# Altium PCB ThermoE.PcbDoc
Units mm, origin at the board's own origin, x right, y up, seen from the top; angles counter-clockwise.
Board outline 47 x 50 mm, 2 copper layers (Top Layer, Bottom Layer), stack 1.671 mm thick; 63 components, 54 nets, 227 pads, 117 vias.
Unrouted connection lines stored in the file: 1.
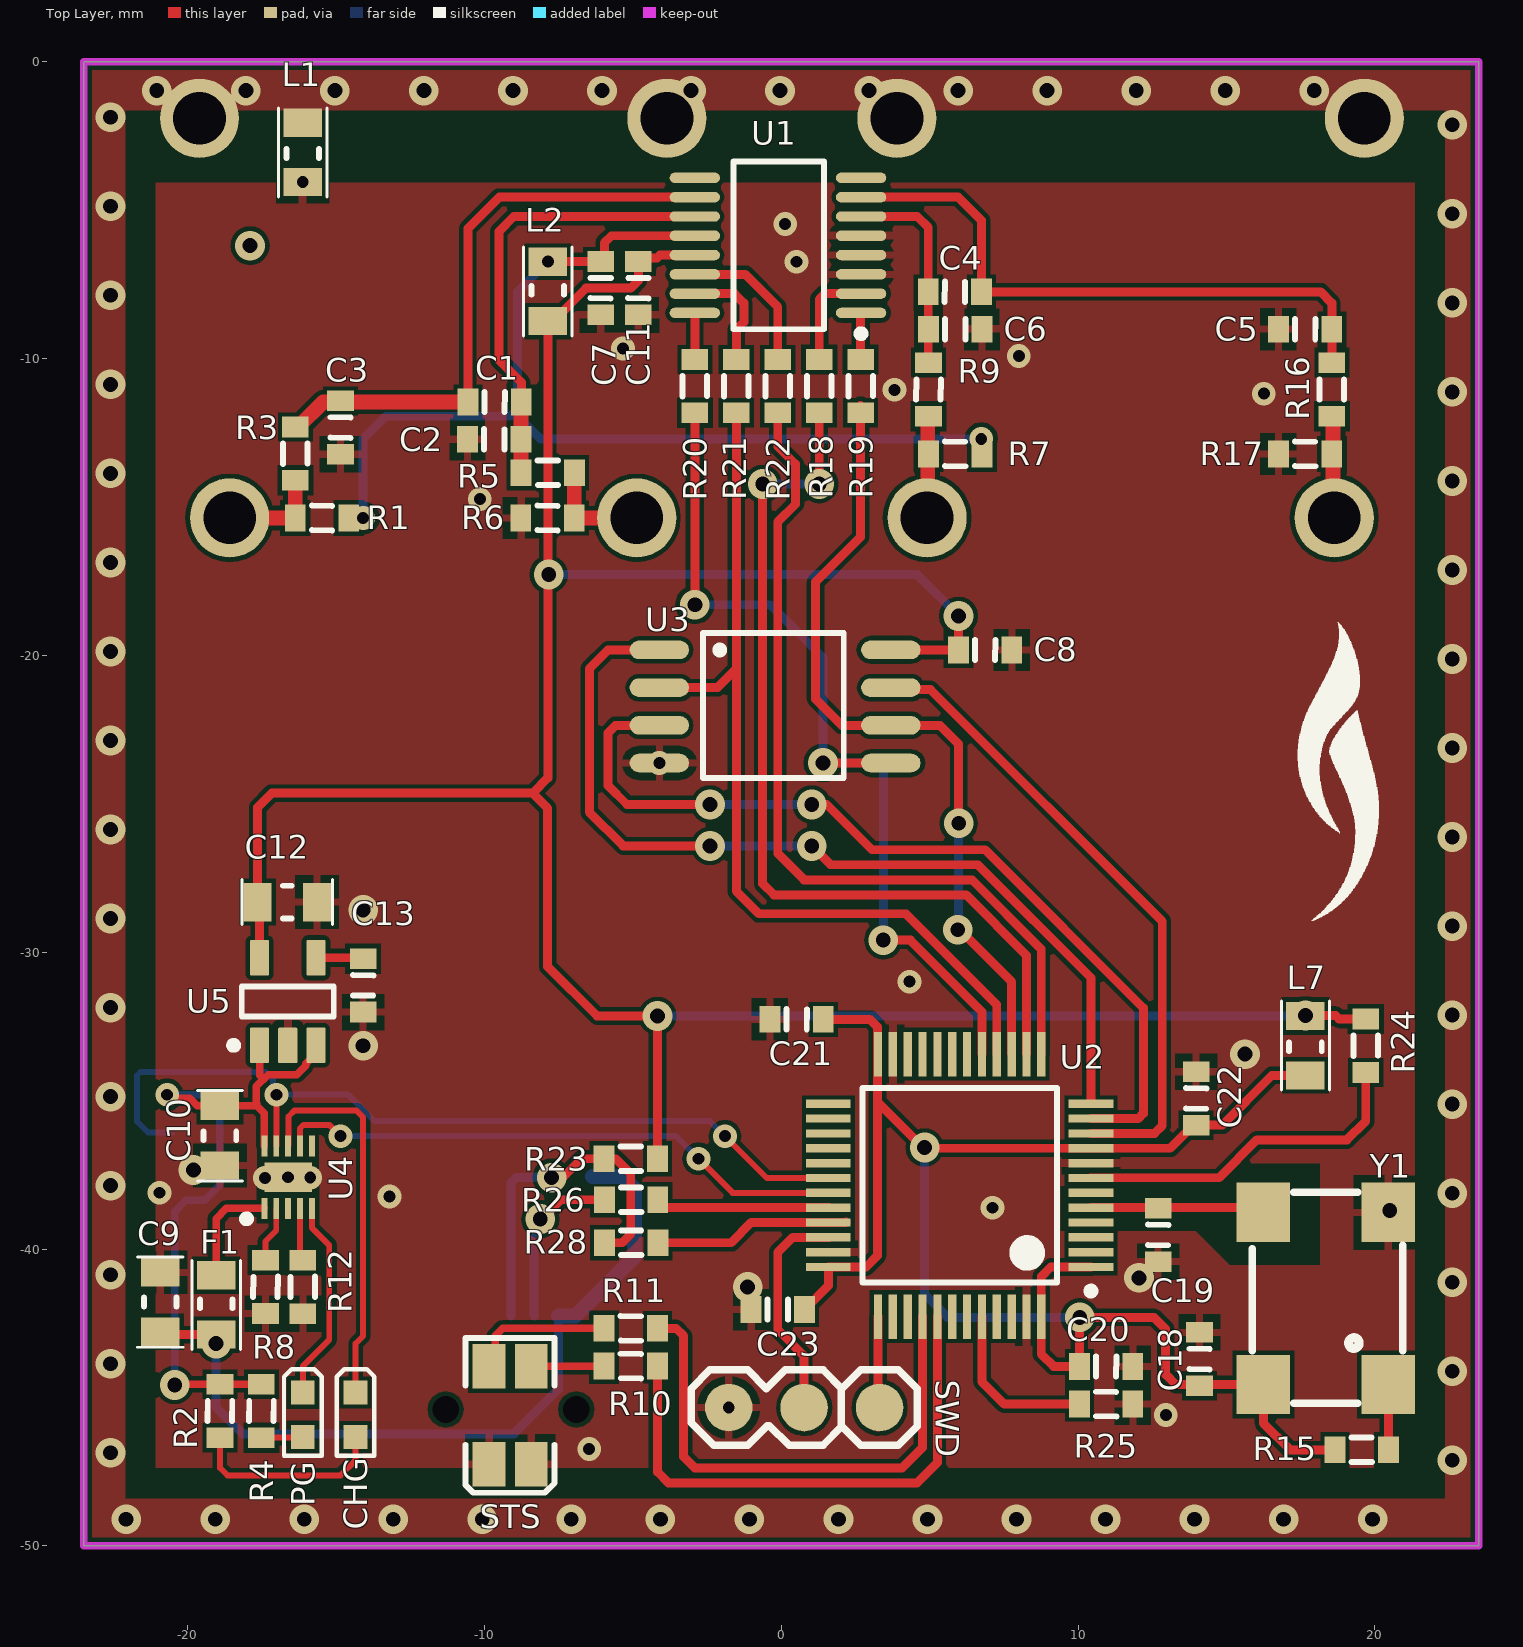
[diagram p0: Top Layer view]
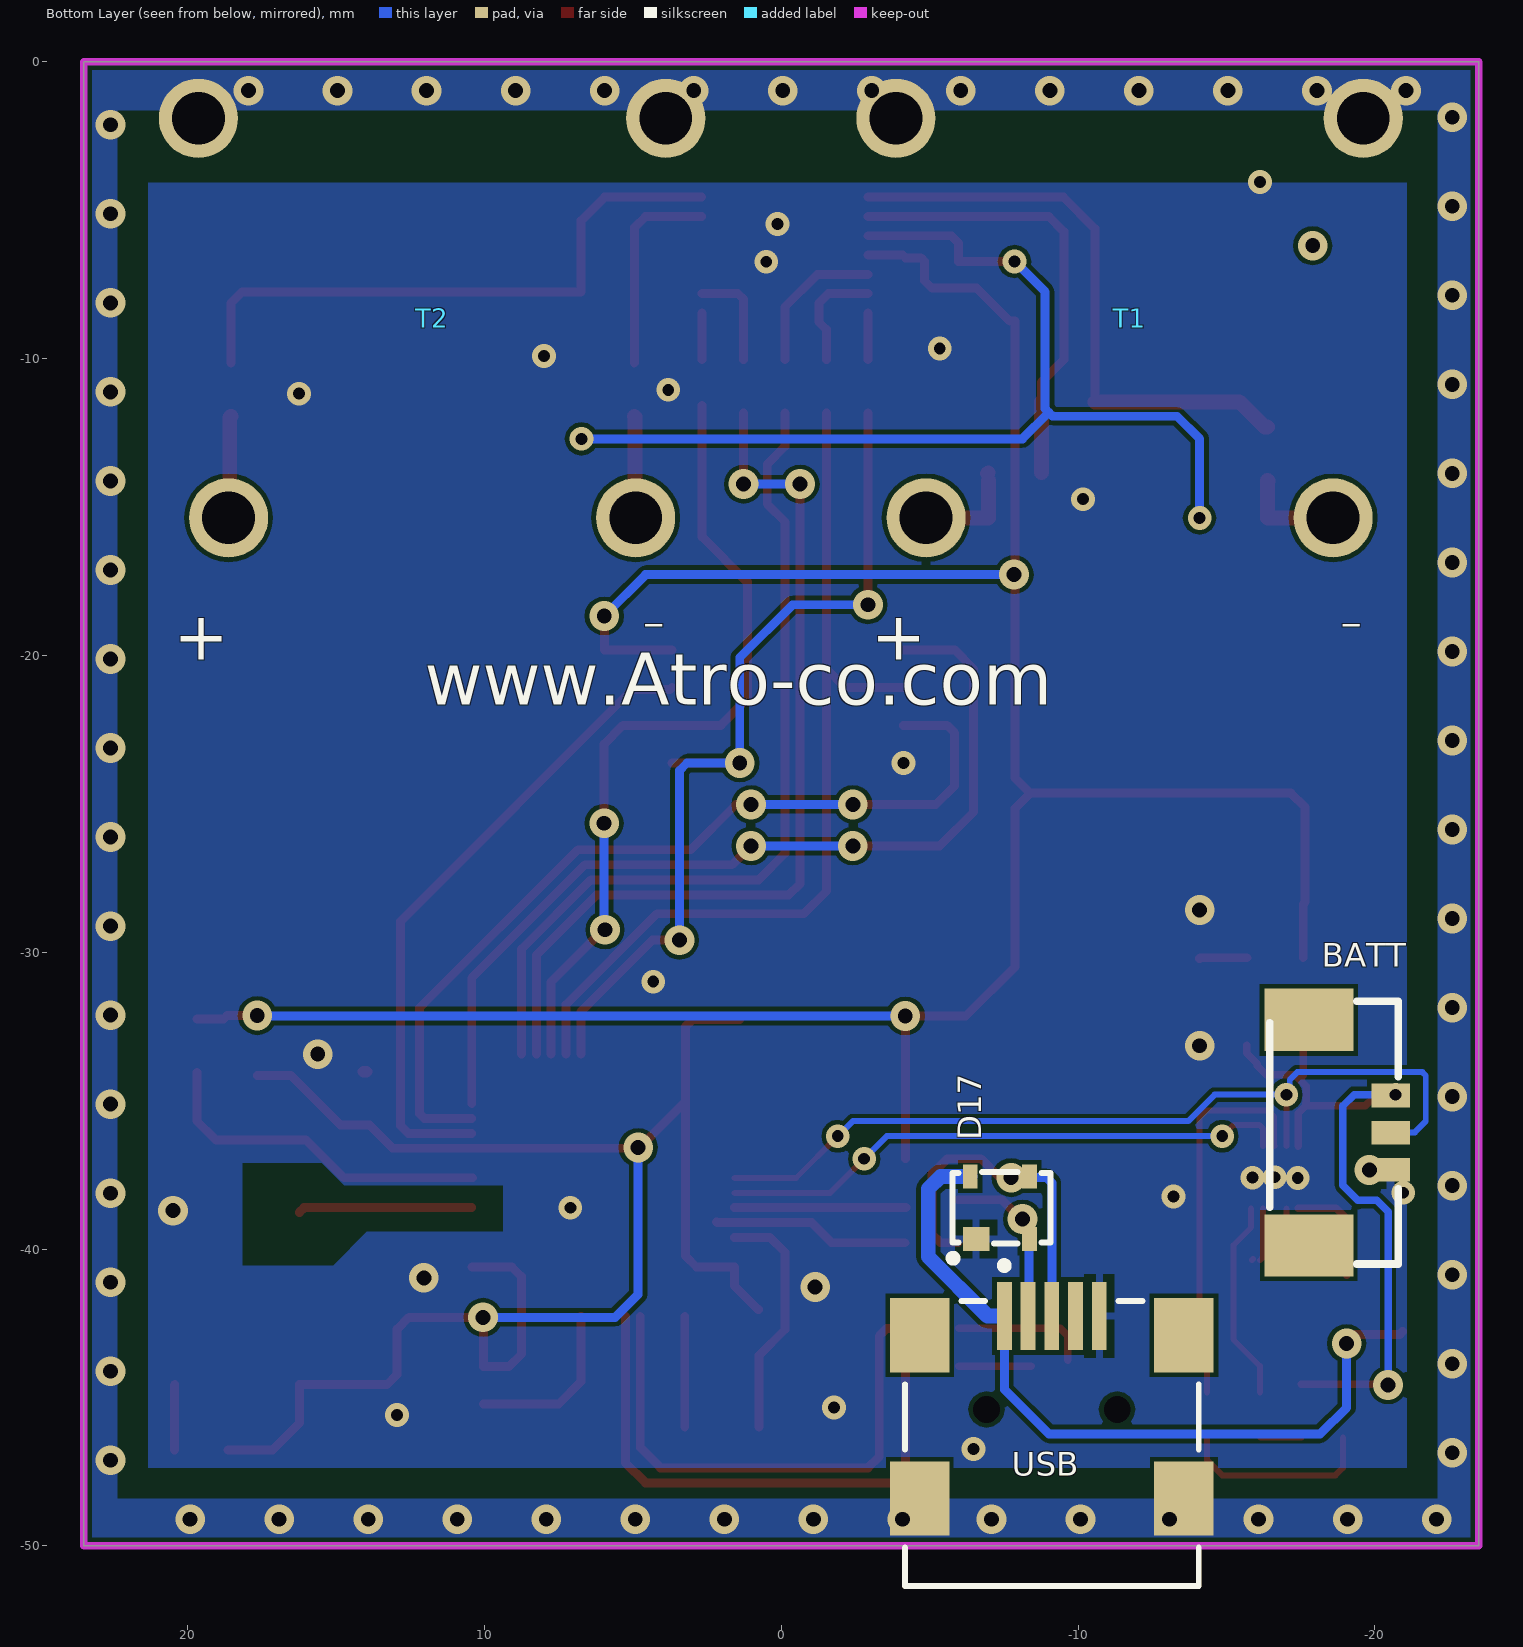
[diagram p1: Bottom Layer view, seen from below]
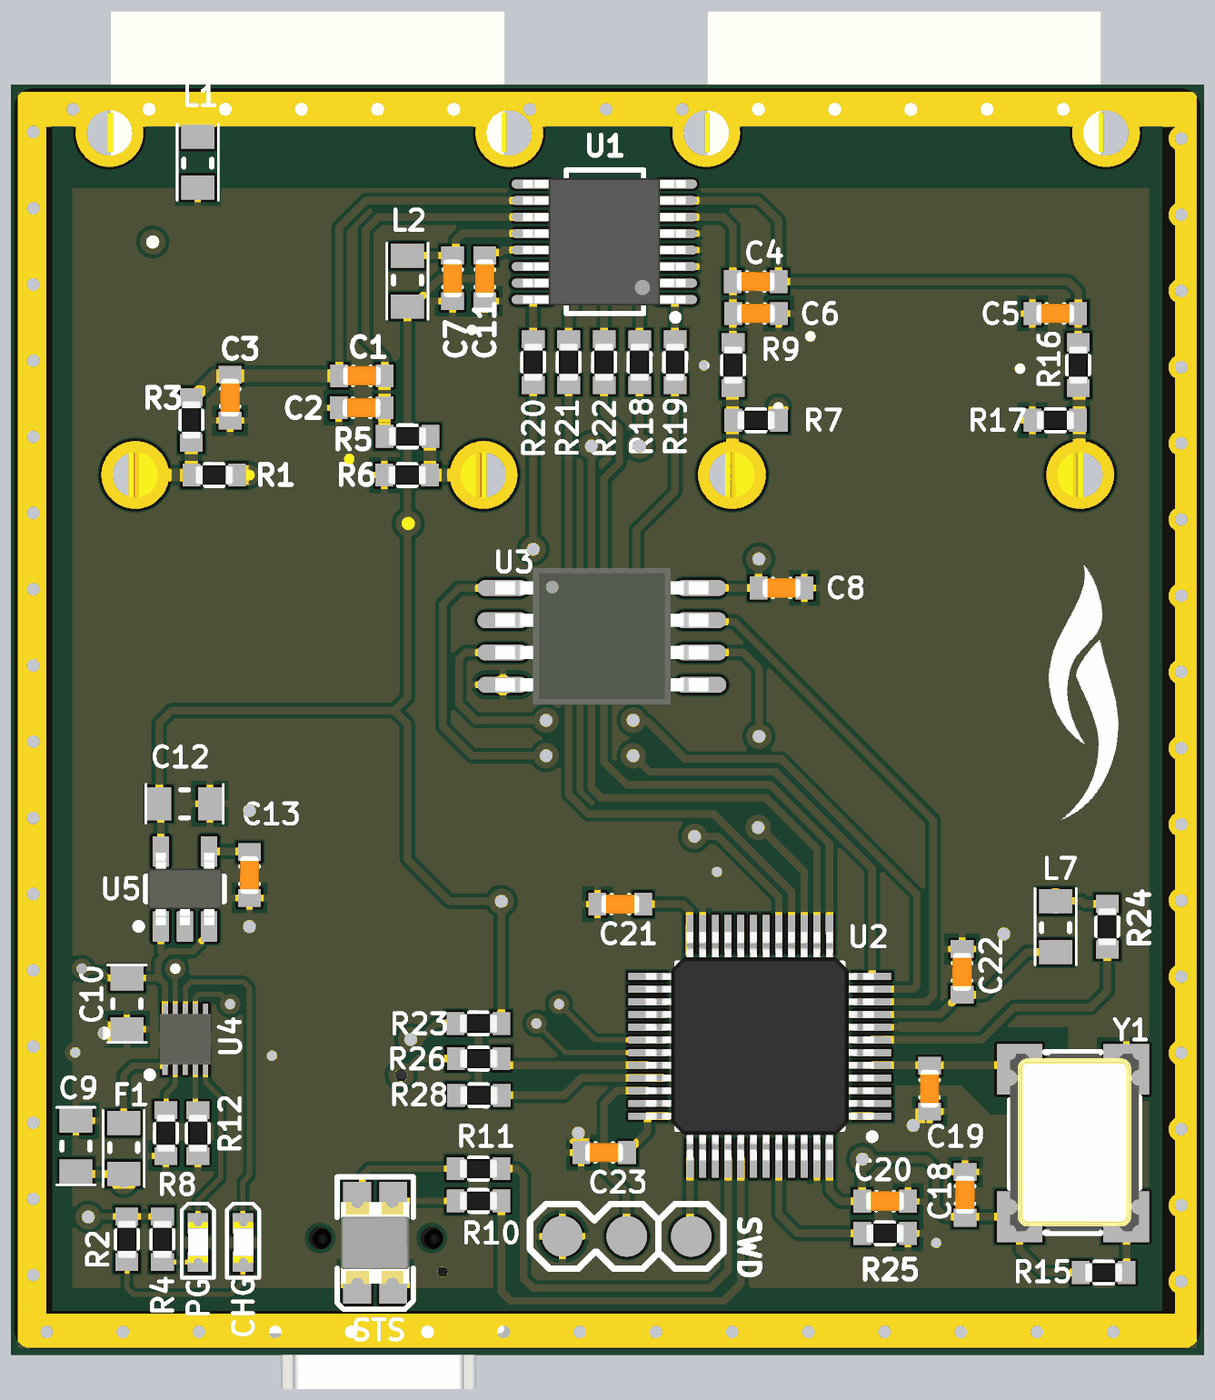
[diagram p2: 3D render of the assembled board from above, using the file's embedded part models]
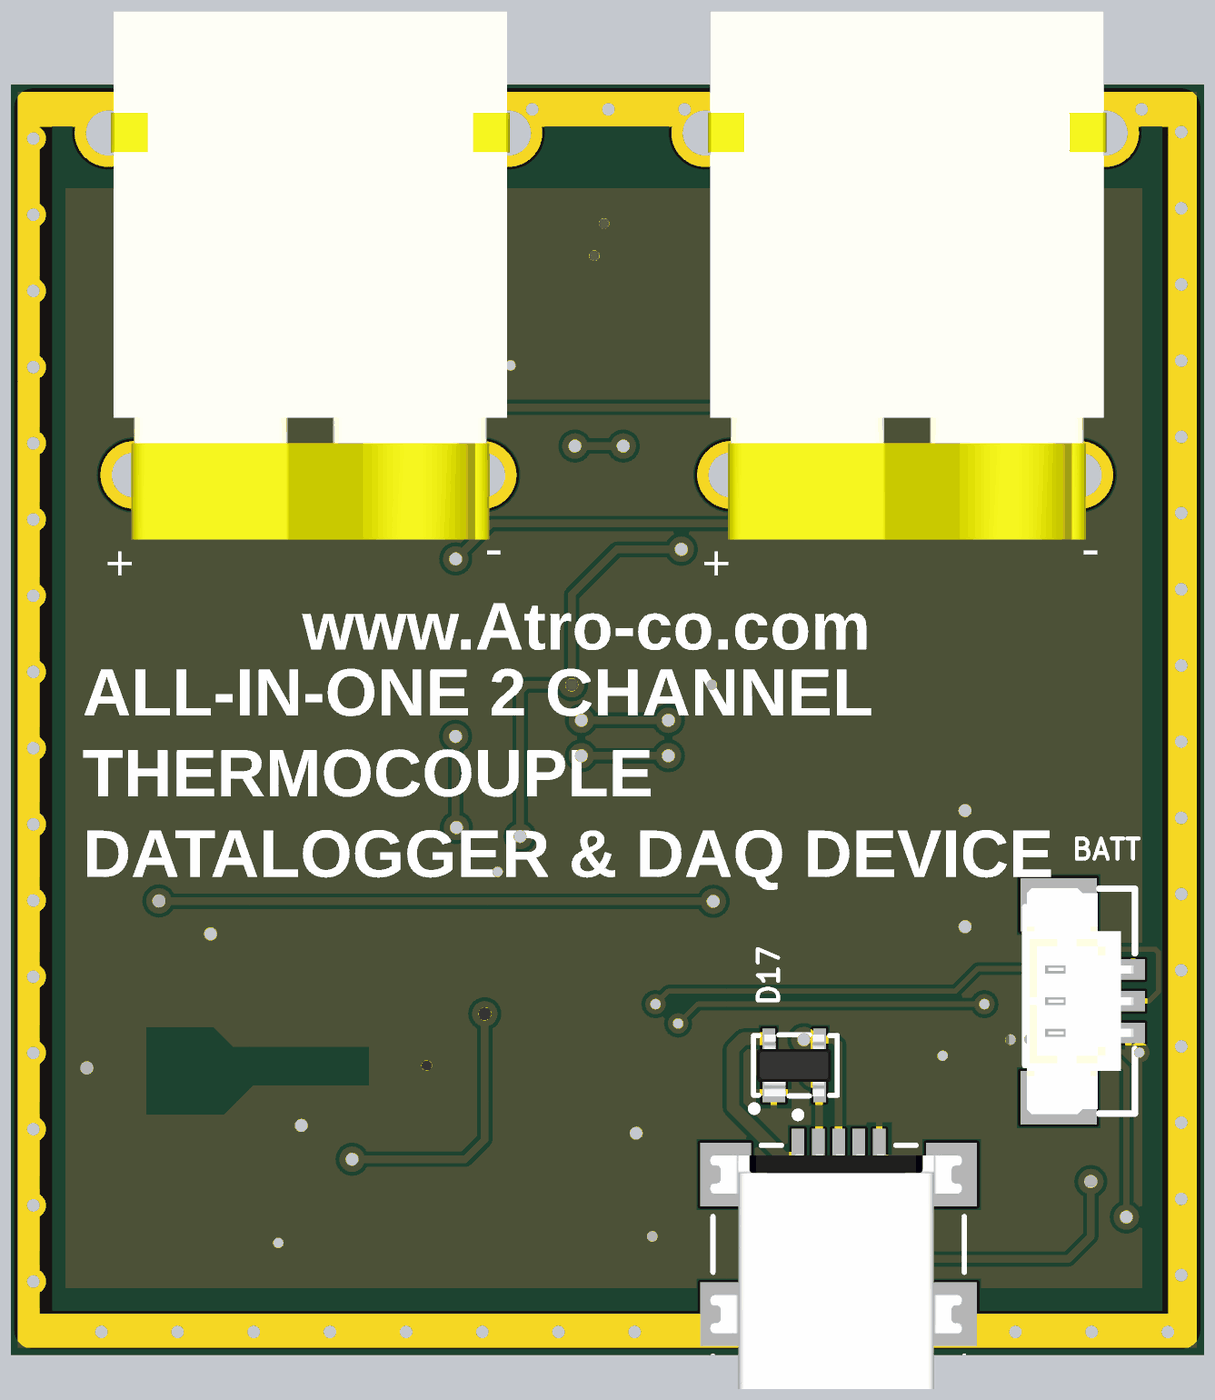
[diagram p3: 3D render of the assembled board from below, using the file's embedded part models]

## Layer stack, top to bottom
Top Solder: solder mask 0.0102, Solder Resist, Dk 3.5
Top Layer: signal copper 0.0356
Dielectric 1: dielectric 1.6, FR-4, Dk 4.8
Bottom Layer: signal copper 0.0356
Bottom Solder: solder mask 0.0102, Solder Resist, Dk 3.5

## Board outline
-23.5,-50 23.5,-50 23.5,0 -23.5,0

## Design rules (kind name [scope] priority, off if disabled: settings)
Clearance [All] p1: gap=0.15 ignorepadtopadclearanceinfootprint=FALSE
ComponentClearance [All] p1: gap=0 collisioncheckmode=3 verticalgap=0 showdistances=FALSE
PolygonConnect PolygonConnect_2 [HasFootprint('DSQ0010A_V')] p1: connectstyle=Direct reliefconductorwidth=0.254 reliefentries=4 polygonreliefangle="90 Angle" airgapwidth=0.254
PolygonConnect PolygonConnect_1 [InNet('BODY')   OR ISVIA] p2: connectstyle=Direct reliefconductorwidth=0.254 reliefentries=4 polygonreliefangle="90 Angle" airgapwidth=0.254
PolygonConnect [All] p3: connectstyle=Relief reliefconductorwidth=0.254 reliefentries=4 polygonreliefangle="90 Angle" airgapwidth=0.254
RoomDefinition CHARGER [InComponentClass('CHARGER')] p1: confinementstyle=ConfineIn formatcopy=TRUE lockcomponents=FALSE outline -12.06,-49.784 -12.06,-25.514 -22.22,-25.514 -22.22,-49.784
RoutingVias [All] p1: holewidth=0.4 width=0.8 viastyle="Through Hole" minholewidth=0.4 minwidth=0.8 maxholewidth=0.8 maxwidth=1
SolderMaskExpansion [All] p1: expansion=0.102 istentingtop=FALSE
Width [All] p1: maxlimit=1 minlimit=0.2 preferedwidth=0.4
29 further rules are at their usual default settings.

## Classes and differential pairs
component class ADC: C1 C2 C3 C4 C5 C6 C7 C11 L2 R1 R3 R5 R6 R7 R9 R16 R17 R18 R19 R20 R21 R22 T1 T2 U1
component class MCU: C8 C18 C19 C20 C21 C22 C23 D17 L1 L7 R10 R11 R15 R23 R24 R25 R26 R28 STS SWD U2 U3 USB Y1
component class CHARGER: BATT C9 C10 C12 C13 CHG F1 PG R2 R4 R8 R12 U4 U5

## Components (designator, comment, footprint, x,y, rotation, side; value= is the part's Value field where it differs from the comment)
BATT "CONN-3" PicoBlade-3-S -20.525,-37.328 r90 bottom
C1 "1uF" c603 -9.664,-11.458 r180 top
C2 "100nF" c603 -9.675,-12.717 r0 top
C3 "100nF" c603 -14.854,-12.319 r90 top
C4 "1uF" c603 5.847,-7.747 r180 top
C5 "100nF" c603 17.647,-9.006 r0 top
C6 "100nF" c603 5.858,-9.006 r180 top
C7 "100nF" C603 -6.091,-7.62 r90 top
C8 "100nF" C603 6.863,-19.812 r180 top
C9 "10uF" C805 -20.926,-41.783 r270 top
C10 "10uF" C805 -18.918,-36.182 r90 top
C11 "100nF" C603 -4.821,-7.62 r90 top
C12 "10uF" C805 -16.648,-28.308 r180 top
C13 "10nF" C603 -14.092,-31.115 r90 top
C18 "100nF" C603 14.091,-43.704 r270 top
C19 "22pF" C603 12.694,-39.524 r270 top
C20 "100nF" C603 10.94,-43.953 r180 top
C21 "100nF" C603 0.513,-32.258 r0 top
C22 "100nF" C603 13.975,-34.925 r270 top
C23 "100nF" C603 -0.122,-42.037 r0 top
CHG "LED" led-0603 -14.346,-46.331 r90 top
D17 "PRTR5V0U2X" SOT-143B -7.361,-38.608 r180 bottom
F1 "Fuse 1" ptc-0805 -19.054,-41.873 r270 top
L1 "Inductor" R805 -16.129,-3.048 r90 top value=10mH
L2 "1K" r805 -7.869,-7.731 r270 top
L7 "Inductor" R805 17.658,-33.147 r90 top value=10mH
PG "LED" led-0603 -16.124,-46.331 r90 top
R1 "1M" R0603 -15.478,-15.367 r0 top
R2 "1.5K" R0603 -18.918,-45.455 r90 top
R3 "500" R0603 -16.378,-13.197 r270 top
R4 "1.5K" R0603 -17.521,-45.455 r90 top
R5 "500" R0603 -7.869,-13.843 r0 top
R6 "1M" R0603 -7.88,-15.367 r0 top
R7 "1M" R0603 5.858,-13.208 r0 top
R8 "1K" R0603 -17.383,-41.273 r270 top
R9 "500" R0603 4.958,-11.038 r270 top
R10 "220" R0603 -5.075,-43.942 r0 top
R11 "220" R0603 -5.075,-42.672 r0 top
R12 "2K" R0603 -16.124,-41.275 r270 top
R15 "10K" R0603 19.552,-46.763 r180 top
R16 "500" R0603 18.547,-11.038 r270 top
R17 "1M" R0603 17.647,-13.208 r0 top
R18 "47" R0603 1.275,-10.922 r90 top
R19 "47" R0603 2.672,-10.922 r90 top
R20 "47" R0603 -2.916,-10.922 r90 top
R21 "47" R0603 -1.519,-10.922 r90 top
R22 "47" R0603 -0.122,-10.922 r90 top
R23 "1.5K" R0603 -5.075,-36.957 r180 top
R24 "10K" R0603 19.69,-33.147 r90 top
R25 "1K" R0603 10.94,-45.223 r180 top
R26 "20" R0603 -5.064,-38.338 r0 top
R28 "20" R0603 -5.059,-39.786 r0 top
STS "LED-RG" LED-1210 -9.139,-45.593 r270 top
SWD "CONN-3" PHDR3 3.307,-45.339 r90 top
T1 "TYPE-K" PCC-SMP -12.506,-7 r90 bottom
T2 "TYPE-K" PCC-SMP 10.994,-7 r90 bottom
U1 "ADS1120PW" TSSOP-16 -0.116,-6.182 r180 top
U2 "STM32F103C8T6" LQFP-48 6.007,-37.853 r180 top
U3 "W25Q64JVSSIQ" SOIC-8W -4.112,-19.812 r0 top
U4 "BQ24040DSQT" SON40P200X200X80-11N -16.621,-37.579 r90 top
U5 "TPS73633DBVT" DBV0005A_M -16.632,-31.659 r90 top
USB "USB MINI" USB-MINI-SMD -9.112,-45.604 r270 bottom
Y1 "8MHz" ASV 16.241,-44.562 r90 top

## Footprints (in the part's own frame and the unit in brackets; to place one, negate y for a bottom-side part, rotate by r counter-clockwise, add the part's x,y. Pads: shape width x height; smd on the part's side, far side on the other; paste and mask are expansions set on the pad)
ASV [mm] "OSC 5x7"
  rect 2x1.8 smd: 1(0,-4.2) 2(5.8,-4.2) 3(5.8,0) 4(0,0)
  silkscreen extent -0.63,-4.7 6.48,0.38, body extent -0.58,-4.7 6.42,0.38, height 1.8
c603 [mm]
  rect 0.7x0.9 smd: 1(-0.9,0) 2(0.9,0)
  silkscreen extent -0.35,-0.34 0.35,0.34, body extent -0.76,-0.38 0.76,0.38, height 0.6
C603 [mm]
  rect 0.7x0.9 smd: 1(-0.9,0) 2(0.9,0)
  silkscreen extent -0.35,-0.34 0.35,0.34, body extent -0.76,-0.38 0.76,0.38, height 0.6
C805 [mm]
  rect 0.95x1.3 smd: 1(-1,0) 2(1,0)
  silkscreen extent -1.52,-0.76 1.52,0.76, body extent -1,-0.62 1,0.63, height 0.78
DBV0005A_M [mm] "SOT23, 5-Leads, Body 3.05x1.75mm, Pitch 0.95mm, IPC Low Density"
  rrect15% 1.2x0.65 smd: 1(-1.475,0.95) 2(-1.475,0) 3(-1.475,-0.95) 4(1.475,-0.95) 5(1.475,0.95)
  silkscreen extent -1.6,-1.55 0.5,1.95, body extent -1.42,-1.46 1.42,1.46, height 1.08
led-0603 [mm]
  rect 0.8x0.8 smd: 1(0,0) 2(1.5,0)
  silkscreen extent -0.64,-0.64 2.29,0.64, body extent -0.04,-0.41 1.56,0.38, height 0.7
LED-1210 [mm]
  rect 1.5x1.1 smd: 1(-1.651,0.713) 2(-1.651,-0.713) 3(1.651,-0.713) 4(1.651,0.713)
  silkscreen extent -2.6,-1.5 2.62,1.5, body extent -1.62,-1.36 1.62,1.34, height 1.1
LQFP-48 [mm]
  rect 1.5x0.28 smd: 1(-4.425,2.75) 2(-4.425,2.25) 3(-4.425,1.75) 4(-4.425,1.25) 5(-4.425,0.75) 6(-4.425,0.25) 7(-4.425,-0.25) 8(-4.425,-0.75) 9(-4.425,-1.25) 10(-4.425,-1.75) 11(-4.425,-2.25) 12(-4.425,-2.75) 25(4.425,-2.75) 26(4.425,-2.25) 27(4.425,-1.75) 28(4.425,-1.25) 29(4.425,-0.75) 30(4.425,-0.25) 31(4.425,0.25) 32(4.425,0.75) 33(4.425,1.25) 34(4.425,1.75) 35(4.425,2.25) 36(4.425,2.75)
  rect 0.28x1.5 smd: 13(-2.75,-4.425) 14(-2.25,-4.425) 15(-1.75,-4.425) 16(-1.25,-4.425) 17(-0.75,-4.425) 18(-0.25,-4.425) 19(0.25,-4.425) 20(0.75,-4.425) 21(1.25,-4.425) 22(1.75,-4.425) 23(2.25,-4.425) 24(2.75,-4.425) 37(2.75,4.425) 38(2.25,4.425) 39(1.75,4.425) 40(1.25,4.425) 41(0.75,4.425) 42(0.25,4.425) 43(-0.25,4.425) 44(-0.75,4.425) 45(-1.25,4.425) 46(-1.75,4.425) 47(-2.25,4.425) 48(-2.75,4.425)
  silkscreen extent -4.55,-3.27 3.27,3.68, body extent -4.5,-4.5 4.5,4.5, height 1.6
PCC-SMP [mil]
  round 105 hole 70: 0(200.79,-279.53) 0(200.79,340.47) 1(-329.21,-239.53) 2(-329.21,300.47)
  body extent -429,-282 390,337, height 388
PHDR3 [mm]
  round 1.6 smd: 1(0,0) 2(0,2.54) 3(0,5.08)
  silkscreen extent -1.27,-1.27 1.27,6.35
PicoBlade-3-S [mm]
  rect 2.1x3 smd: 0(-2.55,2.75) 0(5.05,2.75)
  rect 0.8x1.3 smd: 1(0,0) 2(1.25,0) 3(2.5,0)
  silkscreen extent -3.17,-0.25 5.68,4.06, body extent -3.2,-0.2 5.7,4, height 4.7
ptc-0805 [mm]
  rect 0.95x1.3 smd: 1(1.008,0.009) 2(-0.992,0.009)
  silkscreen extent -1.49,-0.8 1.51,0.82, body extent -1.07,-0.67 1.07,0.67, height 0.66
R0603 [mm]
  rect 0.7x0.9 smd: 1(-0.9,0) 2(0.9,0)
  silkscreen extent -0.34,-0.42 0.34,0.42, body extent -0.76,-0.38 0.76,0.38, height 0.45
R805 [mm]
  rect 0.95x1.3 smd: 1(1,0) 2(-1,0)
  silkscreen extent -1.5,-0.81 1.5,0.81, body extent -1,-0.61 1,0.64, height 0.78
r805 [mm]
  rect 0.95x1.3 smd: 1(1,0) 2(-1,0)
  silkscreen extent -1.5,-0.81 1.5,0.81, body extent -1,-0.61 1,0.64, height 0.78
SOIC-8W [mm]
  oval 2x0.625 smd: 1(0,0) 2(0,-1.27) 3(0,-2.54) 4(0,-3.81) 5(7.8,-3.81) 6(7.8,-2.54) 7(7.8,-1.27) 8(7.8,0)
  silkscreen extent 1.48,-4.32 6.21,0.57, body extent -0.3,-4.59 8.1,0.79, height 2.3
SON40P200X200X80-11N [mm]
  rect 0.7x0.2 smd: 1(-1.05,0.8) 2(-1.05,0.4) 3(-1.05,0) 4(-1.05,-0.4) 5(-1.05,-0.8) 6(1.05,-0.8) 7(1.05,-0.4) 8(1.05,0) 9(1.05,0.4) 10(1.05,0.8)
  rect 1x1.6 smd: 11(0,0)
  silkscreen extent -1.52,1.27 -1.28,1.52, body extent -1,-1 1,1, height 0.8
SOT-143B [mm]
  rect 0.9x0.8 smd: 1(-0.8,-1.05)
  rect 0.5x0.8 smd: 2(1,-1.05) 3(1,1.05) 4(-1,1.05)
  silkscreen extent -1.7,-1.82 1.7,1.2, body extent -1.46,-1.21 1.46,1.21, height 1.65
TSSOP-16 [mm]
  oval 1.7x0.35 smd: 1(-2.8,2.275) 2(-2.8,1.625) 3(-2.8,0.975) 4(-2.8,0.325) 5(-2.8,-0.325) 6(-2.8,-0.975) 7(-2.8,-1.625) 8(-2.8,-2.275) 9(2.8,-2.275) 10(2.8,-1.625) 11(2.8,-0.975) 12(2.8,-0.325) 13(2.8,0.325) 14(2.8,0.975) 15(2.8,1.625) 16(2.8,2.275)
  silkscreen extent -2.93,-2.82 1.5,3.1, body extent -3.2,-2.5 3.2,2.5, height 1.1
USB-MINI-SMD [mm]
  rect 2.5x2 smd: 0(-2.7,-4.45) 0(-2.7,4.45) 0(2.8,-4.45) 0(2.8,4.45)
  rect 2.3x0.5 smd: 1(-3.35,-1.6) 2(-3.35,-0.8) 3(-3.35,0) 4(-3.35,0.8) 5(-3.35,1.6)
  round 0.6 hole 0.9 unplated: MH1(-0.2,2.2) MH2(-0.2,-2.2)
  silkscreen extent -5.17,-4.95 5.75,4.95, body extent -3.5,-5.05 5.75,4.85, height 3.93

## Part data
BATT SWD: "Header, 3-Pin"
C1 C2 C3 C4 C5 C6 C7 C8 C9 C10 C11 C12 C13 C18 C19 C20 C21 C22 C23: library part Cap, "Capacitor", Designer="Parsa Malekpour"
D17: "Ultra low capacitance double rail-to-rail ESD protection diode", reverse standoff voltage=5.5V
F1: "Fuse", LatestRevisionDate=17-Jul-2002, LatestRevisionNote="Re-released for DXP Platform.", PackageDescription="Thru-Hole; 2 Leads", PackageReference=PIN-W2/E2.8, Published=8-Jun-2000, Publisher="Altium Limited"
L2: library part "Ferrite Bead", "FERRITE BEAD", Code_IEC=1005, Code_JEITA=0402, LatestRevisionDate=29-May-2009, LatestRevisionNote="IPC-7351 Footprint Added.", PackageDescription="Chip Inductor", Published=8-Jun-2000, Publisher="Altium Limited"
R1 R2 R3 R4 R5 R6 R7 R8 R9 R10 R11 R12 R15 R16 R17 R18 R19 R20 R21 R22 R23 R24 R25 R26 R28: library part Resistor, "Resistor", Designer="Parsa Malekpour"
STS: library part LED-RG-4
T1 T2: library part THERMOCOUPLE
U1: "ADS1120 4-Channel, 2-kSPS, Low-Power, 16-Bit ADC with Integrated PGA and Reference"
U2: "STM32 ARM-based 32-bit MCU with 64 Kbytes Flash, 48-pin LQFP, Industrial Temperature", ComponentLink1Description="Manufacturer Link", ComponentLink1URL=www.st.com/stm32, ComponentLink2Description=Datasheet, ComponentLink2URL=http://www.st.com/stonline/products/literature/ds/13587.pdf, DatasheetVersion="rev6, Mar-2008", PackageDescription="48-Pin Low-Profile Quad Flat Pack, 7 x 7 mm Body, 0.5 mm Pitch (LQFP48)", PackageReference=LQFP48, PackageVersion=Mar-2008, Published=30-May-2008, Publisher="Altium Limited"
U4: library part CMP-0321-00457-2, "800 mA, Single-Input, Single Cell Li-Ion Battery Charger with Auto Start. Vovp=6.6 V, 3.5 V, -40 to 85 degC, 10-pin SON (DSQ), Green (RoHS & no Sb/Br)", Manufacturer="Texas Instruments", Over Voltage Protection=N, ComponentLink1Description=Datasheet, ComponentLink1URL=http://www.ti.com/general/docs/lit/getliterature.tsp?genericPartNumber=BQ24040&fileType=pdf, DatasheetVersion=SLUS941A, Eco-Plan="Green (RoHS & no Sb/Br)", Lead Acid=N, Li-Ion=N, Li-Polymer=N, Mounting Technology="Surface Mount", NiCd=N, NiMH=N, PackageDescription="10-Pin Plastic Small Outline No-Lead, 2 x 2 x 0.8 mm Body, 0.4 mm Pitch, Exposed Pad", PackageReference=DSQ0010A, PackageVersion="revB, Apr-2010", PartNumber=BQ24040DSQT, SubFamily="Battery Charge Management", Vin(Min)(V)=3.5
U5: library part CMP-0395-00251-2, "Single Output Low Noise LDO, 400 mA, Fixed 3.3 V Output, 1.7 to 5.5 V Input, with Reverse Current Protection, 5-pin SOT-23 (DBV), -40 to 85 degC, Green (RoHS & no Sb/Br)", Manufacturer="Texas Instruments", Rating=Catalog, Accuracy(%)=1, Code_JEDEC=MO-178, ComponentLink1Description="Manufacturer URL", ComponentLink1URL=http://www.ti.com/, ComponentLink2Description=Datasheet, ComponentLink2URL=http://www.ti.com/general/docs/lit/getliterature.tsp?genericPartNumber=TPS73633&fileType=pdf, ComponentLink3Description="Package Specification", ComponentLink3URL=http://www.ti.com/litv/pdf/mpds018i, ComponentLink4Description="URL Link1", ComponentLink4URL="Samples URL:http://www.ti.com/product/tps73633#samples", DatasheetVersion=SBVS038T, Eco-Plan="Green (RoHS & no Sb/Br)", Fixed Output Options(V)=3.3, Iout(Max)(A)=0.4, Iq(Typ)(mA)=0.3, Mounting Technology="Surface Mount", PackageDescription="5-Pin Plastic Small Outline, Body 1.60 Ãƒâ€” 2.90 mm, Pitch 0.95 mm", PackageReference=DBV0005A, PackageVersion=4073253-4/K, PartNumber=TPS73633DBVT, SubFamily="Single Channel LDO", Vdo(Typ)(mV)=75, Vin(Max)(V)=5.5, Vin(Min)(V)=1.7, Vout Adj(Max)(V)=3.3, Vout Adj(Min)(V)=3.3
Y1: library part OSCILLATOR, "OSCILLATOR", Frequency=8MHz
L1 L7: Code_IEC=1005, Code_JEITA=0402, LatestRevisionDate=29-May-2009, LatestRevisionNote="IPC-7351 Footprint Added.", PackageDescription="Chip Inductor", PackageReference=0402-A, Published=8-Jun-2000, Publisher="Altium Limited"

## Via types
v1: diameter 1, hole 0.5, Top Layer to Bottom Layer, 61 vias
v2: diameter 1, hole 0.5, Top Layer to Bottom Layer, tented both sides, 29 vias
v3: diameter 0.8, hole 0.4, Top Layer to Bottom Layer, tented both sides, 27 vias

## Nets (pads, with @x,y where several pads share a name; then routed paths per layer and width w, separated by ;. In a path a pad name is that pad's centre, name@x,y a point inside that pad or via, vN(x,y) a via of type N, cw(c..) or ccw(c..) an arc to the next point about the centre after c; other vN are vias at no path point)
+3.3V: C8.2 C11.2 C12.2 L2.1 L7.1 R23.1 R24.2 U1.13 U3.8 U5.5 | length 93.9
  Top Layer w0.3: U5.5 -17.582,-28.374 C12.2 -17.648,-25.119 -17.167,-24.638 -8.382,-24.638 ; R23.1 v2(-4.175,-32.147) -6.207,-32.147 -7.874,-30.48 -7.874,-25.146 -8.382,-24.638 ; U1.13 -4.089,-6.507 -4.186,-6.604 -4.705,-6.604 C11.2 -4.821,-7.366 -5.075,-7.62 -6.583,-7.62 -7.694,-8.731 L2.1 -7.869,-24.125 -8.382,-24.638 ; U3.8 C8.2 5.963,-18.675 v2(5.969,-18.669) ; v2(17.658,-32.131) 18.674,-32.131 18.79,-32.247 R24.2
  Bottom Layer w0.3: v2(-7.84,-17.272) 4.572,-17.272 v2(5.969,-18.669) ; v2(-4.175,-32.147) 17.642,-32.147 v2(17.658,-32.131)
AVDD: C7.2 L2.2 R1.2 R7.2 U1.12 | length 35.5
  Top Layer w0.3: L2.2 v3(-7.858,-6.72) C7.2 -5.964,-6.72 -5.964,-6.096 -5.725,-5.857 U1.12
  Bottom Layer w0.3: v3(-14.092,-15.367) -14.092,-12.7 -13.33,-11.938 -9.139,-11.938 -9.012,-11.811 ; v3(-7.858,-6.72) -8.885,-7.747 -8.885,-11.684 -9.012,-11.811 ; v3(6.736,-12.7) -8.123,-12.7 -9.012,-11.811
BODY: L1.1 T1.0 T2.0 USB.0
  other v1: -22.078,-49.101 -19.078,-49.101 -16.078,-49.101 -13.078,-49.101 -10.078,-49.101 -7.078,-49.101 -4.078,-49.101 -1.078,-49.101 1.922,-49.101 4.922,-49.101 7.922,-49.101 10.922,-49.101 13.922,-49.101 16.922,-49.101 19.922,-49.101 22.606,-47.117 -22.606,-46.863 22.606,-44.117 -22.606,-43.863 22.606,-41.117 -22.606,-40.863 22.606,-38.117 -22.606,-37.863 22.606,-35.117 -22.606,-34.863 22.606,-32.117 -22.606,-31.863 22.606,-29.117 -22.606,-28.863 22.606,-26.117 -22.606,-25.863 22.606,-23.117 -22.606,-22.863 22.606,-20.117 -22.606,-19.863 22.606,-17.117 -22.606,-16.863 22.606,-14.117 -22.606,-13.863 22.606,-11.117 -22.606,-10.863 22.606,-8.117 -22.606,-7.863 22.606,-5.117 -22.606,-4.863 22.606,-2.117 -22.606,-1.863 -21.045,-0.968 -18.045,-0.968 -15.045,-0.968 -12.045,-0.968 -9.045,-0.968 -6.045,-0.968 -3.045,-0.968 -0.045,-0.968 2.955,-0.968 5.955,-0.968 8.955,-0.968 11.955,-0.968 14.955,-0.968 17.955,-0.968
BOOT0: R25.2 U2.44 | length 5.8
  Top Layer w0.3: U2.44 6.757,-44.469 7.511,-45.223 R25.2
FLASH-HOLD: U2.10 U3.7 | length 21.8
  Top Layer w0.3: U3.7 3.75,-21.144 5.02,-21.144 12.832,-28.956 12.832,-35.842 12.571,-36.103 U2.10
FLASH-WP: U2.11 U3.3 | length 30.1
  Top Layer w0.3: U3.3 -5.583,-22.352 -5.837,-22.606 -5.837,-24.384 -5.202,-25.019 v2(-2.408,-25.019) ; v2(1.021,-25.019) 1.529,-25.019 3.053,-26.543 6.863,-26.543 12.197,-31.877 12.197,-35.427 12.021,-35.603 U2.11
  Bottom Layer w0.3: v2(-2.408,-25.019) v2(1.021,-25.019)
GND: BATT.1 C2.1 C3.1 C5.1 C6.1 C7.1 C8.1 C9.1 C10.1 C11.1 C12.1 C13.1 C18.1 C19.2 C20.1 C21.1 C22.1 C23.1 D17.1 L1.2 R6.1 R8.2 R12.2 R17.1 R25.1 STS.3 STS.4 SWD.3 U1.3 U1.4 U1.5 U2.8 U2.23 U2.35 U2.47 U3.4 U4.3 U4.11 U5.2 USB.5 Y1.2 | length 0.1
  Top Layer w0.4: C22.1 C22.1@14.075,-34.025
  other v2: -1.138,-41.275 12.047,-40.971 20.498,-38.705 -19.812,-37.338 15.622,-33.43 -14.092,-33.147 -14.092,-28.575
  other v3: -6.477,-46.736 12.954,-45.593 -1.773,-45.339 7.112,-38.608 -13.208,-38.227 -20.955,-38.1 -17.399,-37.603 -15.875,-37.592 -16.621,-37.579 4.318,-30.988 -4.112,-23.622 -10.16,-14.732 16.256,-11.176 3.81,-11.049 8.001,-9.906 -5.334,-9.652 0.508,-6.731 0.127,-5.461 -16.129,-4.048
ISET: U2.31 U4.7 | length 19.4
  Top Layer w0.2: U4.7 -16.221,-35.931 -16.104,-35.814 -15.235,-35.814 v3(-14.854,-36.195) ; v3(-2.789,-36.957) -1.643,-38.103 U2.31
  Bottom Layer w0.2: v3(-14.854,-36.195) -3.551,-36.195 v3(-2.789,-36.957)
LED1: R11.2 U2.40 | length 17.9
  Top Layer w0.3: R11.2 -3.551,-42.672 -3.297,-42.926 -3.297,-46.99 -2.916,-47.371 4.069,-47.371 4.757,-46.683 U2.40
LED2: R10.2 U2.41 | length 18.4
  Top Layer w0.3: R10.2 -4.175,-47.509 -3.805,-47.879 4.577,-47.879 5.257,-47.199 U2.41
NetC1_1: C1.1 C2.2 R5.1 U1.11 | length 15.3
  Top Layer w0.3: C1.1 -8.758,-11.452 -8.758,-10.795 -9.52,-10.033 -9.52,-5.715 -9.012,-5.207 U1.11
  Top Layer w0.5: R5.1 C1.1@-8.769,-11.463
NetC1_2: C1.2 C3.2 R3.1 U1.10 | length 20.1
  Top Layer w0.3: C1.2 -10.564,-5.616 -9.505,-4.557 U1.10
  Top Layer w0.5: R3.1 -16.278,-12.297 -15.439,-11.458 C1.2
NetC4_1: C4.1 C5.2 R16.1 U1.7 | length 20.8
  Top Layer w0.3: U1.7 5.959,-4.557 6.747,-5.345 C4.1 18.166,-7.747 18.547,-8.128 C5.2 R16.1
NetC4_2: C4.2 C6.2 R9.1 U1.6 | length 7
  Top Layer w0.3: U1.6 4.577,-5.207 4.947,-5.577 C4.2 4.947,-10.127 R9.1
NetC13_2: C13.2 U5.4 | length 1.6
  Top Layer w0.3: U5.4 -14.123,-30.184 C13.2
NetC19_1: C19.1 U2.5 Y1.3 | length 5.9
  Top Layer w0.3: U2.5 16.082,-38.603 Y1.3
NetCHG_1: CHG.1 R2.1 | length 6.7
  Top Layer w0.2: R2.1 -18.918,-47.371 -18.664,-47.625 -14.854,-47.625 -14.346,-47.117 CHG.1
NetCHG_2: CHG.2 U4.8 | length 13.1
  Top Layer w0.2: U4.8 -16.606,-36.514 -16.606,-35.534 -16.397,-35.325 -14.327,-35.325 -14.092,-35.56 -14.092,-42.926 -14.346,-43.18 CHG.2
NetD1_2: 
NetD17_2: D17.2 R26.1 USB.2 | length 6
  Top Layer w0.3: v2@-8.123,-38.8 v2(-8.123,-38.989) -8.082,-38.989 -7.431,-38.338 R26.1
  Bottom Layer w0.3: USB.2 -8.336,-42.229 -8.336,-39.683 D17.2 -8.261,-39.558 -8.261,-39.316 -8.123,-39.178 v2(-8.123,-38.989)
NetD17_3: D17.3 R23.2 R28.1 USB.3 | length 12.1
  Top Layer w0.3: v2(-7.742,-37.592) -7.738,-37.588 -7.361,-37.588 -6.73,-36.957 R23.2 -5.583,-36.957 -5.075,-37.465 -5.075,-39.497 -5.364,-39.786 R28.1
  Bottom Layer w0.3: USB.3 -9.112,-37.768 -8.936,-37.592 -8.361,-37.592 -8.344,-37.575 -7.759,-37.575 v2(-7.742,-37.592)
NetF1_2: F1.2 U4.1 | length 3.7
  Top Layer w0.254: F1.2 -19.045,-38.976 -18.698,-38.629 U4.1
NetPG_1: PG.1 R4.1 | length 1.4
  Top Layer w0.2: R4.1 -16.148,-46.355 PG.1
NetPG_2: PG.2 U4.5 | length 6.8
  Top Layer w0.2: PG.2 -16.124,-43.942 -15.235,-43.053 -15.235,-39.865 -15.821,-39.279 U4.5
NetR1_1: R1.1 R3.2 T1.1 | length 3.6
  Top Layer w0.5: T1.1@-18.564,-15.335 T1.1 -18.588,-15.365 -16.381,-15.365 R1.1 R3.2 R3.2@-16.405,-14.123
NetR5_2: R5.2 R6.2 T1.2 | length 3.4
  Top Layer w0.5: R5.2@-6.98,-14.097 R6.2 -6.978,-15.365 -4.877,-15.365 T1.2 ; R5.2 R5.2@-6.943,-13.869
NetR7_1: R7.1 R9.2 T2.1 | length 3.4
  Top Layer w0.5: T2.1 4.934,-15.338 4.934,-11.962 R9.2
NetR8_1: R8.1 U4.2 | length 1.9
  Top Layer w0.2: R8.1 -17.383,-39.738 -17.021,-39.376 U4.2
NetR10_1: R10.1 STS.1 | length 2.5
  Top Layer w0.254: STS.1 R10.1
NetR11_1: R11.1 STS.2 | length 4.6
  Top Layer w0.254: STS.2@-9.647,-43.737 -9.647,-42.926 -9.393,-42.672 R11.1
NetR12_1: R12.1 U4.4 | length 1.8
  Top Layer w0.2: U4.4 -16.221,-40.278 R12.1 ; R12.1@-15.895,-40.337 R12.1@-15.859,-40.373
NetR15_1: R15.1 Y1.1 | length 2.2
  Top Layer w0.3: Y1.1 20.452,-44.573 R15.1
NetR16_2: R16.2 R17.2 T2.2 | length 3.5
  Top Layer w0.5: R16.2 18.586,-11.977 18.586,-15.322 T2.2
NetR18_2: R18.2 U1.2 | length 3.5
  Top Layer w0.3: R18.2 1.275,-8.001 1.479,-7.797 2.674,-7.797 U1.2
NetR19_2: R19.2 U1.1 | length 1.6
  Top Layer w0.3: R19.2 U1.1@2.672,-8.459
NetR20_2: R20.2 U1.16 | length 1.6
  Top Layer w0.3: R20.2 U1.16
NetR21_2: R21.2 U1.15 | length 3.8
  Top Layer w0.3: U1.15 -1.586,-7.807 -1.265,-8.128 -1.265,-8.763 -1.519,-9.017 R21.2
NetR22_2: R22.2 U1.14 | length 5
  Top Layer w0.3: U1.14 -1.22,-7.157 -0.122,-8.255 R22.2
NetU2_38: U2.38
NRST: R24.1 U2.7 | length 11.7
  Top Layer w0.3: U2.7@10.412,-37.596 14.746,-37.596 16.02,-36.322 19.055,-36.322 19.69,-35.687 R24.1
SPI-CLK: R19.1 U2.15 U3.6 | length 27.2
  Top Layer w0.3: R19.1@2.672,-11.568 R19.1 2.672,-16.002 1.148,-17.526 1.148,-21.463 2.037,-22.352 U3.6 5.339,-22.352 5.974,-22.987 v2(5.974,-25.654) ; v2(5.942,-29.242) 6.006,-29.242 7.757,-30.993 U2.15
  Bottom Layer w0.3: v2(5.942,-29.242) 5.974,-29.21 v2(5.974,-25.654)
SPI-CS0: R18.1 U2.14 | length 31
  Top Layer w0.3: v2(-0.63,-14.224) -0.63,-27.686 -0.249,-28.067 6.223,-28.067 8.257,-30.101 U2.14 ; v2(1.275,-14.224) R18.1
  Bottom Layer w0.3: v2(-0.63,-14.224) v2(1.275,-14.224)
SPI-CS1: U2.12 U3.1 | length 30.9
  Top Layer w0.3: U3.1 -5.837,-19.812 -6.472,-20.447 -6.472,-25.278 -5.334,-26.416 v2(-2.408,-26.416) ; v2(1.021,-26.416) 1.656,-27.051 6.621,-27.051 10.432,-30.862 U2.12
  Bottom Layer w0.3: v2(-2.408,-26.416) v2(1.021,-26.416)
SPI-INT: R22.1 U2.13 | length 29.1
  Top Layer w0.3: R22.1 -0.122,-12.954 0.475,-13.551 0.475,-14.897 -0.122,-15.494 -0.122,-26.67 0.767,-27.559 6.422,-27.559 8.757,-29.894 U2.13
SPI-MISO: R21.1 U2.16 U3.2 | length 31
  Top Layer w0.3: U3.2 -2.154,-21.082 -1.519,-20.447 ; R21.1 -1.519,-20.447 ; U2.16 7.257,-31.763 4.196,-28.702 -0.757,-28.702 -1.519,-27.94 -1.519,-20.447
SPI-MOSI: R20.1 U2.17 U3.5 | length 31
  Top Layer w0.3: v2(-2.916,-18.288) R20.1 ; v2(1.402,-23.622) U3.5 ; v2(3.434,-29.591) 4.344,-29.591 6.757,-32.004 U2.17
  Bottom Layer w0.3: v2(-2.916,-18.288) -0.376,-18.288 1.402,-20.066 v2(1.402,-23.622) 3.18,-23.622 3.434,-23.876 v2(3.434,-29.591)
SWCLK: SWD.1 U2.37 | length 3.7
  Top Layer w0.3: SWD.1@3.257,-46.001 U2.37
SWDIO: SWD.2 U2.34 | length 8.2
  Top Layer w0.3: SWD.2@0.756,-46.001 0.756,-43.588 -0.122,-42.71 -0.122,-40.111 0.386,-39.603 U2.34
TS: BATT.2 U2.30 U4.9 | length 29.7
  Top Layer w0.2: U4.9 -17.017,-36.525 -17.017,-34.802 v3(-17.013,-34.798) ; v3(-1.9,-36.195) -0.492,-37.603 U2.30
  Bottom Layer w0.2: BATT.2 -20.535,-36.068 -21.342,-36.068 -21.712,-35.698 -21.712,-34.153 -21.595,-34.036 -17.382,-34.036 -17.128,-34.291 -17.128,-34.683 v3(-17.013,-34.798) -14.6,-34.798 -13.711,-35.687 -2.408,-35.687 v3(-1.9,-36.195)
USBDM: R26.2 U2.32 | length 5.8
  Top Layer w0.3: R26.2@-4.2,-38.603 U2.32
USBDP: R28.2 U2.33 | length 6.6
  Top Layer w0.3: R28.2 -1.694,-39.786 -1.011,-39.103 U2.33 2.172,-39.103 U2.33@2.182,-39.093
VBAT: BATT.3 C10.2 R2.2 R4.2 U4.10 U5.1 U5.3 | length 24.8
  Top Layer w0.254: v3@-20.95,-34.912 -19.934,-34.912 -19.68,-35.166 -18.934,-35.166 C10.2 -18.902,-35.166 -17.675,-35.166 ; v2(-20.442,-44.577) -20.42,-44.555 R2.2 R4.2 ; U5.1 -17.582,-34.15 -17.452,-34.28 ; U4.10 -17.421,-35.42 -17.675,-35.166 ; U5.3 -15.682,-33.409 -16.03,-33.757 -16.03,-33.82 -16.331,-34.121 -17.293,-34.121 -17.69,-34.518 -17.69,-35.078 -17.675,-35.093 -17.675,-35.166
  Bottom Layer w0.254: v3(-20.696,-34.798) -19.299,-34.798 -18.918,-35.179 -18.918,-37.846 -19.426,-38.354 -20.061,-38.354 -20.442,-38.735 v2(-20.442,-44.577)
VMCU: C18.2 C20.2 C21.2 C22.2 C23.2 L7.2 R15.2 U2.1 U2.9 U2.24 U2.36 U2.48 Y1.4 | length 59.4
  Top Layer w0.3: C23.2 1.582,-41.233 U2.36 2.86,-40.603 3.237,-40.226 3.237,-35.036 ; C21.2 2.983,-32.258 3.237,-32.512 3.237,-35.036 ; U2.1 9.083,-40.603 8.757,-40.929 U2.48 8.757,-43.537 9.173,-43.953 C20.2 10.04,-42.313 v2(10.051,-42.302) 12.551,-42.302 12.948,-42.699 12.948,-44.223 13.287,-44.562 Y1.4 16.241,-45.865 17.139,-46.763 R15.2 ; L7.2 16.531,-34.147 14.853,-35.825 C22.2 13.875,-35.825 13.097,-36.603 U2.9 4.804,-36.603 3.237,-35.036
  Bottom Layer w0.3: v2(4.826,-36.576) 4.826,-41.529 5.599,-42.302 v2(10.051,-42.302)
VUSB: C9.2 D17.4 F1.1 USB.1 | length 26.3
  Top Layer w0.3: C9.2 -20.828,-42.881 F1.1
  Bottom Layer w0.3: v2(-19.045,-43.18) -19.045,-45.339 -18.156,-46.228 -9.012,-46.228 -7.512,-44.728 USB.1
  Bottom Layer w0.5: USB.1 -6.943,-42.254 -4.948,-40.259 -4.948,-37.973 -5.363,-37.558 D17.4
pads on no net: BATT.0 U1.8 U1.9 U2.2 U2.3 U2.4 U2.6 U2.18 U2.19 U2.20 U2.21 U2.22 U2.25 U2.26 U2.27 U2.28 U2.29 U2.39 U2.42 U2.43 U2.45 U2.46 U4.6 USB.4 USB.MH1 USB.MH2
copper on no net:
  other v2: -17.902,-6.19

## Polygon pours and split planes (outlines as drawn)
GND on Top Layer "GND_L01_P001" (solid, pour order 1): -21.077,-47.371 -21.077,-4.064 21.341,-4.064 21.341,-47.371
BODY on Top Layer "BODY_L01_P000" (solid, pour order 0): -23.744,0 23.756,0 23.756,-50 -23.744,-50 -23.744,-48.387 -22.093,-48.387 -22.093,-1.651 22.357,-1.651 22.357,-48.387 -23.744,-48.387
GND on Bottom Layer "GND_L02_P002" (solid, pour order 2): -21.077,-47.371 -21.077,-4.064 21.341,-4.064 21.341,-47.371
BODY on Bottom Layer "BODY_L02_P003" (solid, pour order 3): -23.744,0 23.756,0 23.756,-50 -23.744,-50 -23.744,-48.387 -22.093,-48.387 -22.093,-1.651 22.357,-1.651 22.357,-48.387 -23.744,-48.387

## Keep-outs
Keep-Out Layer:
  the board outline again, w0.254

## Other copper
Multi-Layer:
  pour cut-out: 9.392,-37.873 9.392,-39.397 13.964,-39.397 15.107,-40.54 18.155,-40.54 18.155,-37.111 15.488,-37.111 14.726,-37.873

## Silkscreen, mask and mechanical layers (free items; w line width, h text height)
Top Overlay:
  drawing of 2 lines, arcs and shapes, not listed
Bottom Overlay:
  text "www.Atro-co.com" at 12.012,-22.232 h3
  text "ALL-IN-ONE 2 CHANNEL THERMOCOUPLE DATALOGGER & DAQ DEVICE" at 20.815,-33.087 h3
Top Solder:
  lines w1.5: -22.606,-49.022 22.606,-49.022 22.606,-0.889 -22.606,-0.889 -22.606,-49.022
Bottom Solder:
  lines w1.5: -22.606,-49.022 -22.606,-0.889 22.606,-0.889 22.606,-49.022 -22.606,-49.022

## Text inside footprints (layer, text, board x,y; h text height)
T1: Bottom Overlay "-" at -19.606,-17.902 h2.76 r180; Bottom Overlay "+" at -4.874,-18.2 h2.76 r180
T2: Bottom Overlay "+" at 18.626,-18.2 h2.76 r180; Bottom Overlay "-" at 3.894,-17.902 h2.76 r180
USB: Mechanical 1 "PCB Edge" at -5.076,-51.086 h0.25